# EAGLE board solar WiFi weather station (EAGLE 9.6.2)
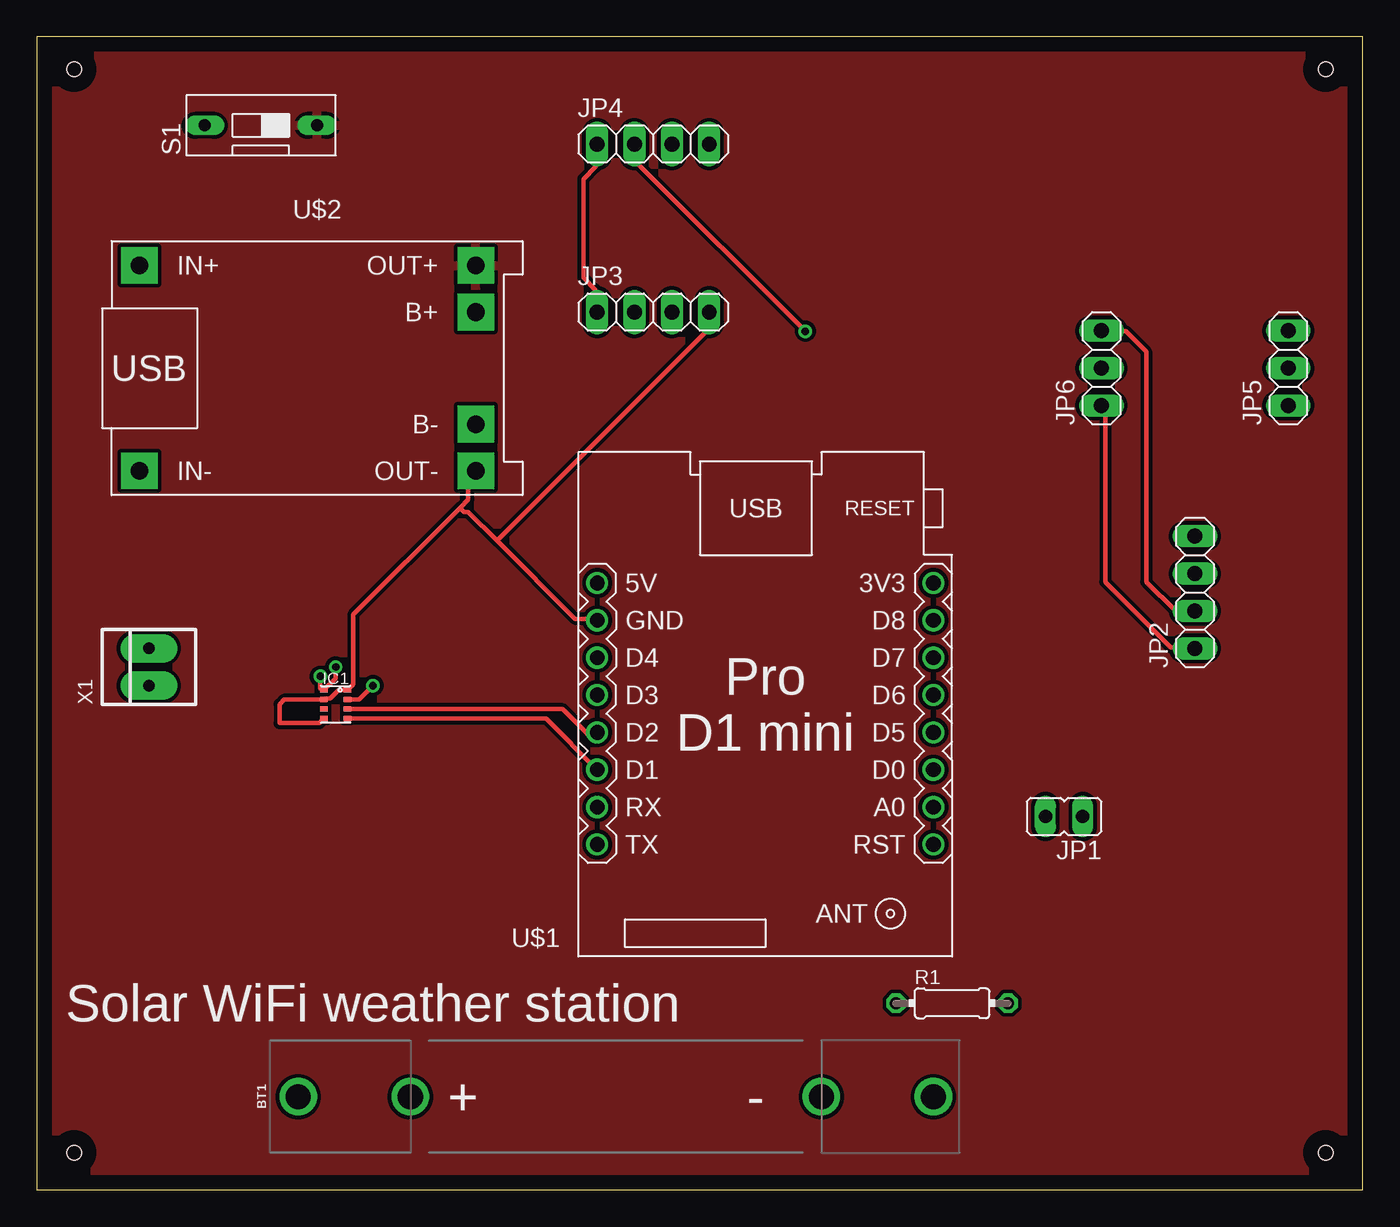
[diagram p0: board, top side]
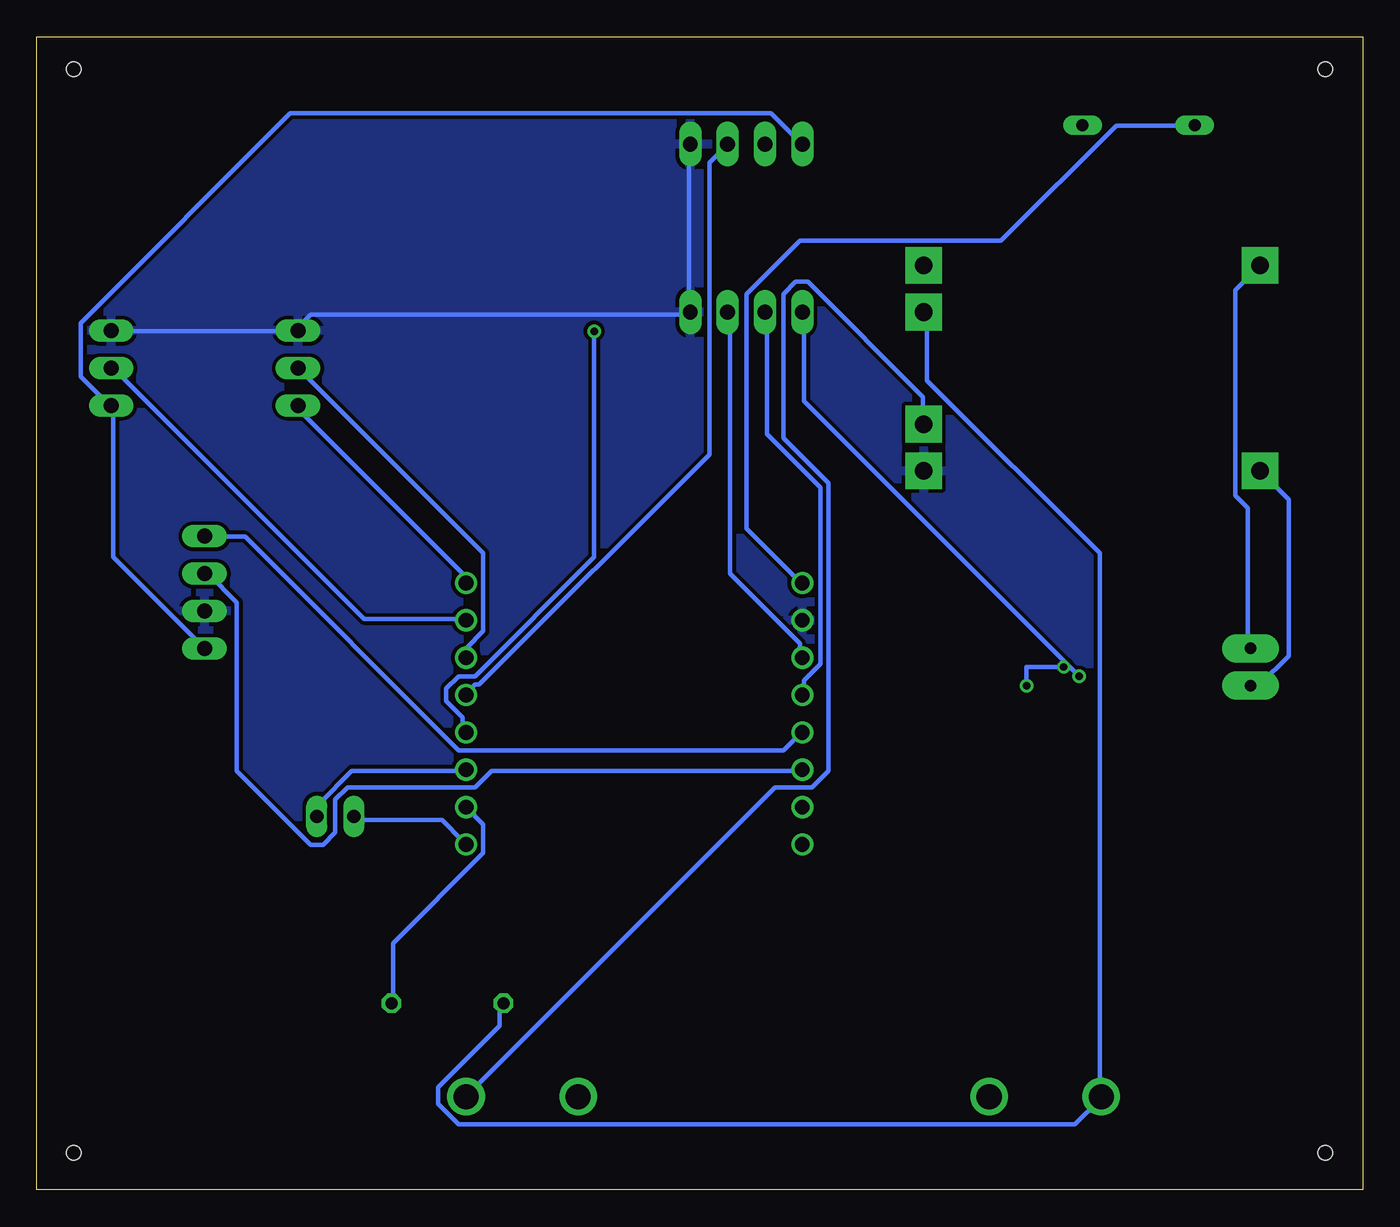
[diagram p1: board, bottom side, seen from below]

Size 90.15 x 78.41 mm. Coordinates in mm from the lower left corner, seen from the top.
Outline: 0,0 90.15,0 90.15,78.41 0,78.41 0,0
Copper layers (1*16): Top 0.035mm / dielectric 1.5mm / Bottom 0.035mm
Design rules "default": minimum track width 6mil, minimum drill 0.35mm, track to track 6mil, track to pad 6mil, pad to pad 6mil, via to via 6mil, smd to smd 6mil, copper to edge 40mil, drill to drill 6mil, minimum pad ring 10mil, minimum via ring 8mil, stop-mask expansion 4mil, vias tented up to drill 0mil, thermal gap 10mil
Net classes: 0 default: width 0.305 mm, drill 0.508 mm, clearance 0.254 mm
Holes 1 mm at 2.54,2.54 87.63,2.54 2.54,76.2 87.63,76.2

## Footprints (pad centres in the part's own frame; a part is rotated, then mirrored left to right if it is on the bottom)
BATTERY-AAA = drill 1.702: GND@1 21.59,0; GND@2 13.97,0; PWR@1 -21.59,0; PWR@2 -13.97,0
BMP280 = smd 0.5 x 0.35: 1 0.8,0.975; 2 0.8,0.325; 3 0.8,-0.325; 4 0.8,-0.975; 5 -0.8,-0.975; 6 -0.8,-0.325; 7 -0.8,0.325; 8 -0.8,0.975
JP1 = drill 0.914 long: 1 0,-1.27; 2 0,1.27
1X04 = drill 1.016 long: 1 -3.81,0; 2 -1.27,0; 3 1.27,0; 4 3.81,0
1X03 = drill 1.016 long: 1 -2.54,0; 2 0,0; 3 2.54,0
0204/7 = drill 0.813 octagon: 1 -3.81,0; 2 3.81,0
DS-01 = drill 0.813 long: 1 0,-3.81; 2 0,3.81
WEMOS-D1-MINI-PRO = drill 1: JP1.1 -11.43,9.525; JP1.2 -11.43,6.985; JP1.3 -11.43,4.445; JP1.4 -11.43,1.905; JP1.5 -11.43,-0.635; JP1.6 -11.43,-3.175; JP1.7 -11.43,-5.715; JP1.8 -11.43,-8.255; JP2.1 11.43,9.525; JP2.2 11.43,6.985; JP2.3 11.43,4.445; JP2.4 11.43,1.905; JP2.5 11.43,-0.635; JP2.6 11.43,-3.175; JP2.7 11.43,-5.715; JP2.8 11.43,-8.255
BATTERY-CHARGER-LI-PROT = drill 1.2 pad 2.5 square: B+ 10.795,3.81; B- 10.795,-3.81; IN+ -12.065,6.985; IN- -12.065,-6.985; OUT+ 10.795,6.985; OUT- 10.795,-6.985
22-23-2021 = drill 0.8 pad 1.93 long: 1 -1.27,0; 2 1.27,0

## Placement (x,y rotation side)
BT1  [BATTERY-AAA]  39.37,6.35 0 top
IC1  BMP280  [BMP280]  20.32,33.02 0 top
JP1  [JP1]  69.85,25.4 90 top
JP2  PINHD-1X4  [1X04]  78.74,40.64 90 top
JP3  PINHD-1X4  [1X04]  41.91,59.69 0 top
JP4  PINHD-1X4  [1X04]  41.91,71.12 0 top
JP5  PINHD-1X3  [1X03]  85.09,55.88 90 top
JP6  PINHD-1X3  [1X03]  72.39,55.88 90 top
R1  220K  [0204/7]  62.23,12.7 0 top
S1  DS01E  [DS-01]  15.24,72.39 90 top
U$1  WEMOS-D1-MINI-PRO  [WEMOS-D1-MINI-PRO]  49.53,33.02 180 top
U$2  BATTERY-CHARGER-LI-PROT  [BATTERY-CHARGER-LI-PROT]  19.05,55.88 0 top
X1  22-23-2021  [22-23-2021]  7.62,35.56 90 top

## Library data of the parts
BT1 = SparkFun-Batteries; PROD_ID: BATT-08571; SF_SKU: PRT-12718
IC1 = BeagleBone_Blue_R3
JP1 = jumper
JP2-JP6 = Connector; CATEGORY: CONNECTOR; SUB-CATEGORY: PIN-HEADER
R1 = rcl; SPICEPREFIX: R
S1 = Switch; CATEGORY: SWITCH; TYPE: SPST
U$1 U$2 = diy-modules
X1 = con-molex; MF: MOLEX; MPN: 22-23-2021; OC_FARNELL: 1462926; OC_NEWARK: 25C3832

## Nets
GND: IC1.1 IC1.5 IC1.7 JP2.2 JP3.4 JP4.4 JP5.3 JP6.3 U$1.JP2.7 U$2.OUT-
N$1: U$2.IN+ X1.2
N$2: U$2.IN- X1.1
N$3: BT1.PWR@1 R1.1 U$2.B+
N$4: BT1.GND@1 U$2.B-
N$5: R1.2 U$1.JP1.2
N$6: JP1.1 U$1.JP1.3
N$7: JP1.2 U$1.JP1.1
N$8: S1.2 U$1.JP2.8
N$9: JP3.2 U$1.JP2.5
N$10: IC1.2 IC1.8 JP2.1 JP3.1 JP4.1 JP5.1 JP6.1 U$1.JP1.8
N$11: IC1.4 JP2.3 U$1.JP2.3
N$12: JP3.3 U$1.JP2.6
N$13: IC1.3 JP2.4 U$1.JP2.4
N$14: JP4.2 U$1.JP1.4
N$15: JP4.3 U$1.JP1.5
N$16: JP6.2 U$1.JP1.6
N$17: JP5.2 U$1.JP1.7
VCC: S1.1 U$2.OUT+

## Tracks (layer width: path | path; a pad name or v marks a point on that pad's centre or on a via)
GND
  Top 0.305: 28.78,46.38 29.34,46.94 29.34,48.62 29.62,48.9 U$2.OUT- | 28.78,46.38 21.51,39.12 21.51,34.37 21.23,34.09 IC1.1 20.52,33.99 19.94,33.41 19.59,33.41 IC1.7 16.84,33.34 16.51,33.02 16.51,31.75 19.23,31.75 IC1.5 | 31.29,44.15 29.34,46.1 29.06,46.1 28.78,46.38 | 31.29,44.15 36.6,38.84 38,38.84 U$1.JP2.7 | JP2.2 78.51,39.4 77.39,39.4 75.44,41.35 75.44,57 74.04,58.4 72.64,58.4 JP6.3 | 31.29,44.15 45.54,58.4 45.54,59.51 JP3.4
  Bottom 0.305: JP4.4 45.82,70.97 45.82,59.79 JP3.4 45.82,59.51 71.53,59.51 72.36,58.67 JP6.3 72.64,58.4 84.94,58.4 JP5.3
  pour Bottom: 0,78.74 0,0 90.17,0 90.17,78.74
N$1
  Bottom 0.305: U$2.IN+ 8.66,61.19 8.66,47.22 7.82,46.38 7.82,36.88 X1.2
N$2
  Bottom 0.305: U$2.IN- 5.03,46.94 5.03,36.32 6.99,34.37 7.54,34.37 X1.1
N$3
  Bottom 0.305: R1.1 58.67,12.57 58.67,11.18 62.87,6.99 62.87,5.87 61.47,4.47 19.56,4.47 17.88,6.15 BT1.PWR@1 17.88,6.43 17.88,43.31 29.62,55.04 29.62,59.51 U$2.B+
N$4
  Bottom 0.305: U$2.B- 29.9,52.25 29.9,53.92 37.72,61.75 38.56,61.75 39.4,60.91 39.4,51.13 36.32,48.06 36.32,28.5 37.44,27.38 39.95,27.38 60.91,6.43 BT1.GND@1
N$5
  Bottom 0.305: U$1.JP1.2 59.79,24.87 59.79,22.91 65.94,16.76 65.94,12.85 R1.2
N$6
  Bottom 0.305: JP1.1 70.97,25.43 70.97,26.26 68.73,28.5 61.19,28.5 U$1.JP1.3
N$7
  Bottom 0.305: JP1.2 68.45,25.15 62.59,25.15 61.19,23.75 U$1.JP1.1
N$8
  Bottom 0.305: S1.2 11.46,72.36 16.76,72.36 24.59,64.54 38.28,64.54 41.91,60.91 41.91,44.98 38.28,41.35 U$1.JP2.8
N$9
  Bottom 0.305: U$1.JP2.5 38,33.81 38,34.65 36.88,35.76 36.88,47.78 40.51,51.41 40.51,59.51 JP3.2
N$10  (via drill 0.51)
  Top 0.305: JP2.1 78.51,36.88 77.11,36.88 72.64,41.35 72.64,53.09 JP6.1 | v19.28,34.92 19.28,34.09 IC1.8 20.32,34.8 v20.32,35.56 | JP4.1 38,70.97 38,69.57 37.16,68.73 37.16,62.03 38,61.19 38,59.79 JP3.1 | v22.86,34.29 21.91,33.34 IC1.2
  Bottom 0.305: JP2.1 84.94,43.03 84.94,53.09 JP5.1 85.22,53.37 87.17,55.32 87.17,58.95 72.92,73.2 40.23,73.2 38.28,71.25 JP4.1 | U$1.JP1.8 61.19,41.35 61.19,41.91 72.36,53.09 JP6.1 | v19.28,34.92 38,53.65 38,59.51 JP3.1 | v20.32,35.56 22.86,35.56 v22.86,34.29
N$11
  Top 0.305: IC1.4 34.63,32.05 U$1.JP2.3
  Bottom 0.305: U$1.JP2.3 38.28,28.5 59.23,28.5 60.35,27.38 69.01,27.38 69.85,26.54 69.85,24.31 70.69,23.47 71.53,23.47 76.56,28.5 76.56,39.95 78.51,41.91 JP2.3
N$12
  Bottom 0.305: U$1.JP2.6 38.28,36.32 38.28,37.16 43.03,41.91 43.03,59.51 JP3.3
N$13
  Top 0.305: IC1.3 21.23,32.69 35.76,32.69 37.44,31.01 38,31.01 U$1.JP2.4
  Bottom 0.305: JP2.4 78.51,44.42 76,44.42 61.47,29.9 39.4,29.9 38.28,31.01 U$1.JP2.4
N$14  (via drill 0.51)
  Top 0.305: v52.25,58.4 40.79,69.85 40.79,70.97 JP4.2
  Bottom 0.305: v52.25,58.4 52.25,43.03 60.35,34.92 61.47,34.92 62.31,34.09 62.31,33.25 61.19,32.13 61.19,31.29 U$1.JP1.4
N$15
  Bottom 0.305: U$1.JP1.5 60.91,33.81 60.35,34.37 60.07,34.37 44.42,50.01 44.42,69.85 43.31,70.97 JP4.3
N$16
  Bottom 0.305: U$1.JP1.6 60.91,36.32 60.91,36.88 59.79,38 59.79,43.31 72.36,55.88 JP6.2
N$17
  Bottom 0.305: U$1.JP1.7 61.19,38.84 67.89,38.84 84.94,55.88 JP5.2
VCC
  pour Top: 0,78.74 0,0 90.17,0 90.17,78.74

## Text on the board
tPlace: Solar WiFi weather station